# EAGLE board Ex Alligator (EAGLE 7.6.0)

Size 65 x 15 mm. Coordinates in mm from the lower left corner, seen from the top.
Outline: 0,0 65,0 65,15 0,15 0,0
Copper layers (1*16): Top 0.035mm / dielectric 1.5mm / Bottom 0.035mm
Design rules "default": minimum track width 10mil, minimum drill 24mil, track to track 8mil, track to pad 8mil, pad to pad 8mil, via to via 8mil, smd to smd 8mil, copper to edge 40mil, drill to drill 8mil, minimum pad ring 10mil, minimum via ring 8mil, stop-mask expansion 4mil, vias tented up to drill 0mil, thermal gap 10mil

## Footprints (pad centres in the part's own frame; a part is rotated, then mirrored left to right if it is on the bottom)
1X10-BIG = drill 1.016 pad 1.778 octagon: 1 -11.43,0; 2 -8.89,0; 3 -6.35,0; 4 -3.81,0; 5 -1.27,0; 6 1.27,0; 7 3.81,0; 8 6.35,0; 9 8.89,0; 10 11.43,0
BIGTAP = drill 3.2 pad 5.08: P$1 0,0

## Placement (x,y rotation side)
NUSBIO_IN  PINHD-1X10  [1X10-BIG]  32.5,1.5 180 top
TP1  SEWTAPBIG  [BIGTAP]  60.5,10.5 0 top
TP2  SEWTAPBIG  [BIGTAP]  52.5,10.5 0 top
TP3  SEWTAPBIG  [BIGTAP]  44.5,10.5 0 top
TP4  SEWTAPBIG  [BIGTAP]  36.5,10.5 0 top
TP5  SEWTAPBIG  [BIGTAP]  28.5,10.5 0 top
TP6  SEWTAPBIG  [BIGTAP]  20.5,10.5 0 top
TP7  SEWTAPBIG  [BIGTAP]  12.5,10.5 0 top
TP8  SEWTAPBIG  [BIGTAP]  4.5,10.5 0 top
TP9  SEWTAPBIG  [BIGTAP]  60,4 270 top
TP10  SEWTAPBIG  [BIGTAP]  5,4 90 top

## Library data of the parts
NUSBIO_IN TP1-TP10 = adafruit

## Nets
GPIO0: NUSBIO_IN.1 TP1.P$1
GPIO1: NUSBIO_IN.2 TP2.P$1
GPIO2: NUSBIO_IN.3 TP3.P$1
GPIO3: NUSBIO_IN.4 TP4.P$1
GPIO4: NUSBIO_IN.5 TP5.P$1
GPIO5: NUSBIO_IN.6 TP6.P$1
GPIO6: NUSBIO_IN.7 TP7.P$1
GPIO7: NUSBIO_IN.8 TP8.P$1
GROUND: NUSBIO_IN.10 TP10.P$1
VCC: NUSBIO_IN.9 TP9.P$1

## Tracks (layer width: path | path; a pad name or v marks a point on that pad's centre or on a via)
GPIO0  (1 unrouted)
GPIO1  (1 unrouted)
GPIO2  (1 unrouted)
GPIO3  (1 unrouted)
GPIO4  (1 unrouted)
GPIO5  (1 unrouted)
GPIO6  (1 unrouted)
GPIO7  (1 unrouted)
GROUND  (1 unrouted)
VCC  (1 unrouted)

## Text on the board
tNames: 7 | 6 | 5 | 4 | 3 | 2 | 1 | 0 | Alligator Extension | GND | VCC
bNames: MadeInTheUSB.net | PCBv1 2016-07